# Altium PCB theremin.PcbDoc
Units mm, origin at the board's own origin, x right, y up, seen from the top; angles counter-clockwise.
Board outline 85.6 x 53.97 mm, 2 copper layers (Top Layer, Bottom Layer); 54 components, 32 nets, 165 pads, 28 vias.
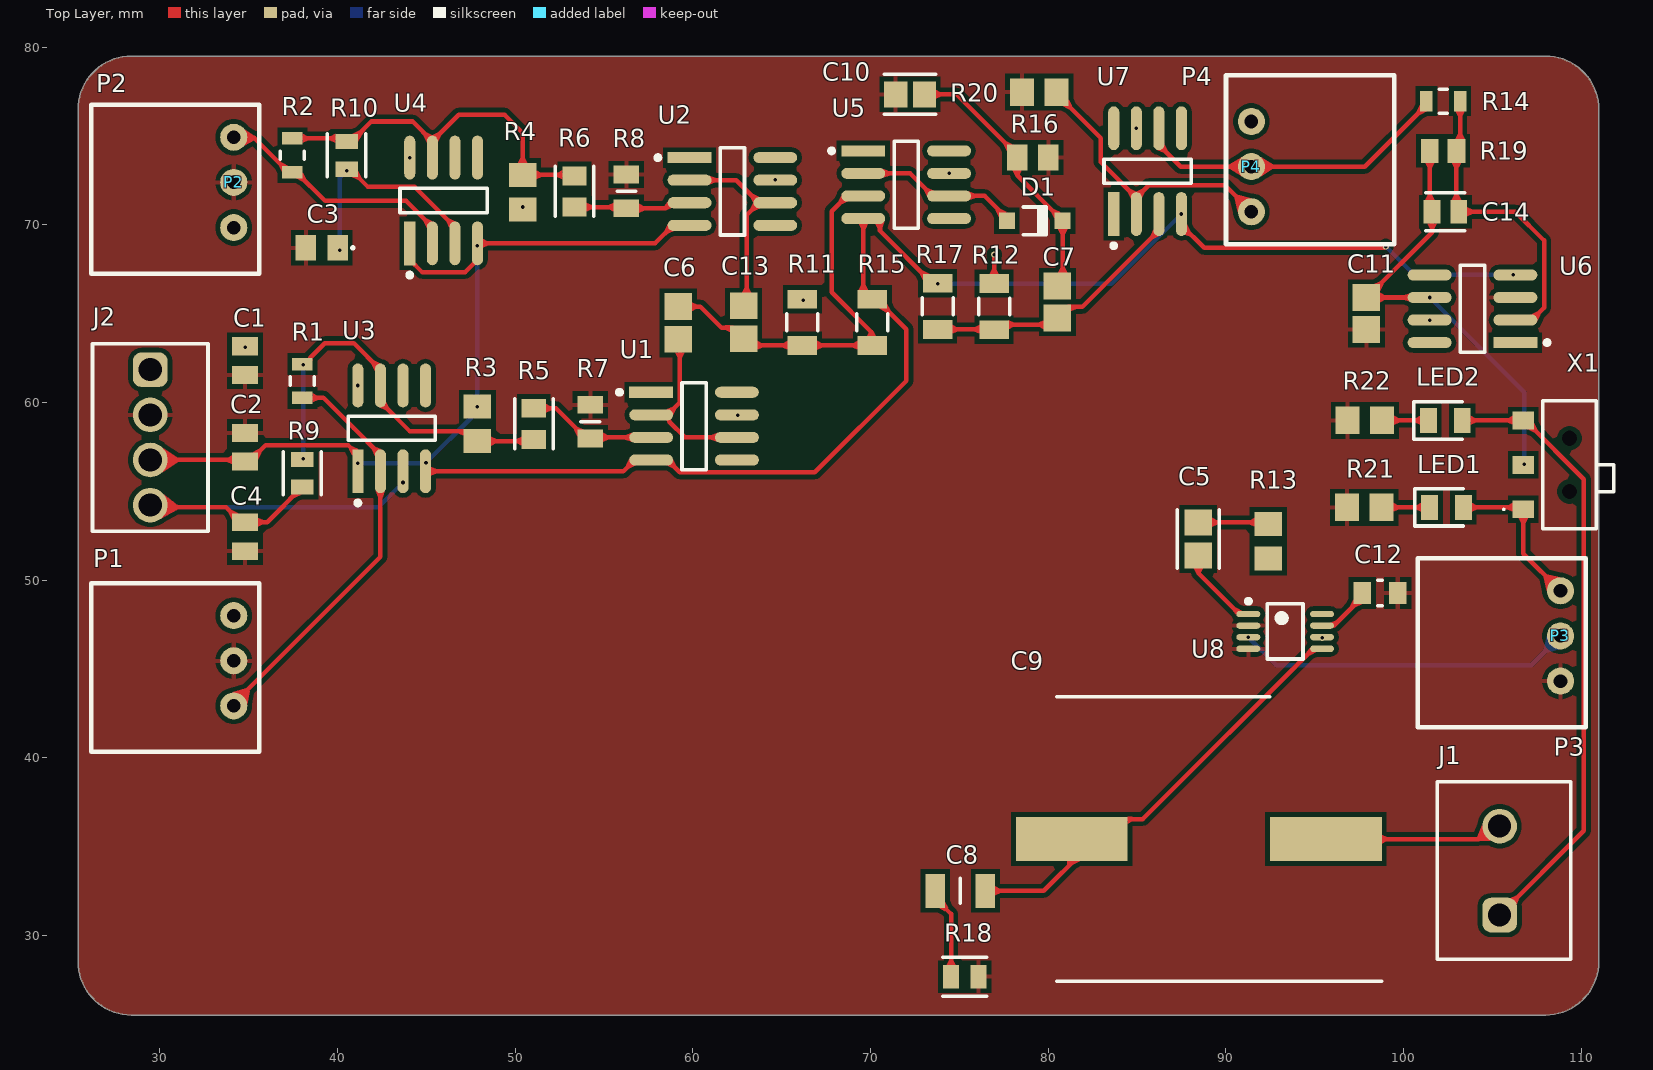
[diagram p0: Top Layer view]
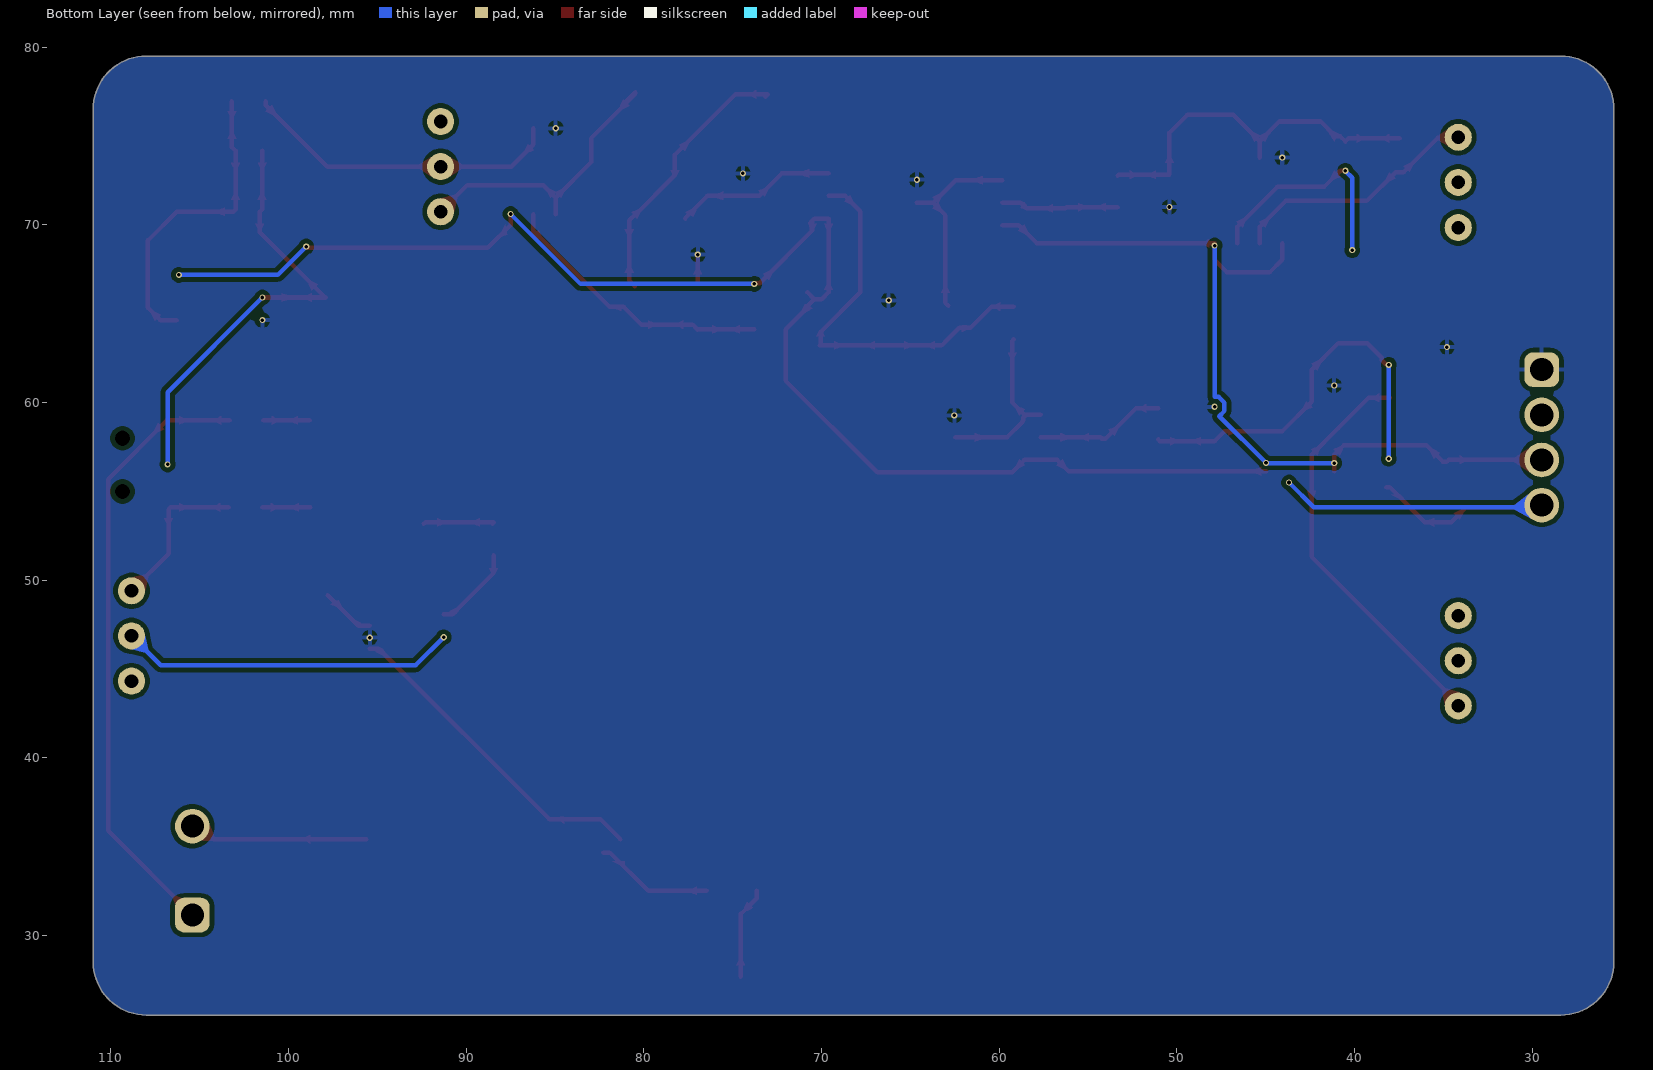
[diagram p1: Bottom Layer view, seen from below]
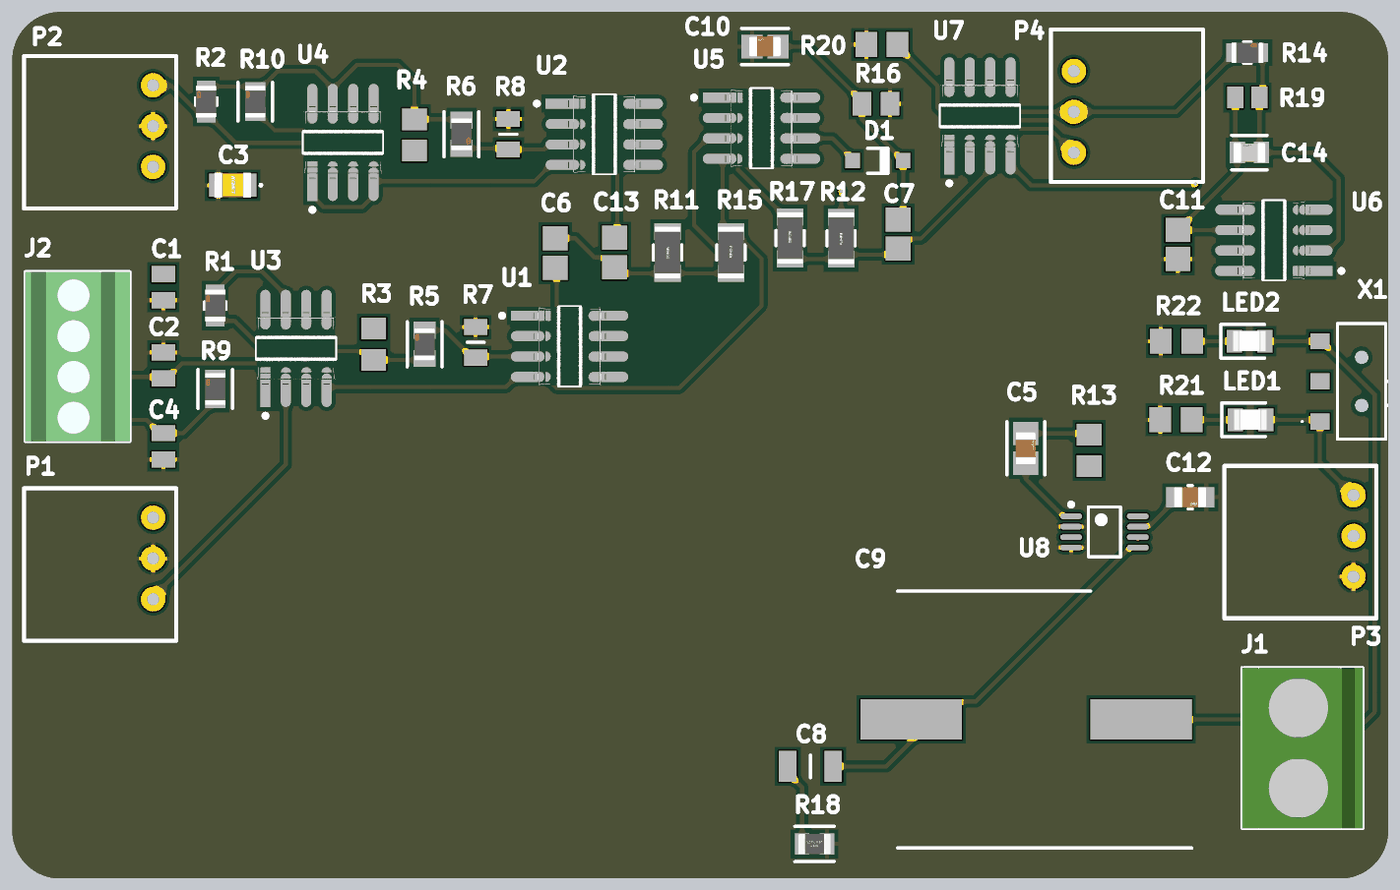
[diagram p2: 3D render of the assembled board from above, using the file's embedded part models]

## Layer stack, top to bottom
Top Solder: solder mask 0.0102, Solder Resist, Dk 3.5
Top Layer: signal copper 0.0356
Dielectric 1: dielectric 0.32, FR-4, Dk 4.8
Bottom Layer: signal copper 0.0356
Bottom Solder: solder mask 0.0102, Solder Resist, Dk 3.5

## Board outline
28.4,25.527 cw(c28.4,28.527) 25.4,28.527 25.4,76.502 cw(c28.4,76.502) 28.4,79.502 107.998,79.502 cw(c107.998,76.502) 110.998,76.502 110.998,76.454 110.998,28.527 cw(c107.998,28.527) 107.998,25.527 107.95,25.527

## Design rules (kind name [scope] priority, off if disabled: settings)
Clearance [All] p1: gap=0.254 ignorepadtopadclearanceinfootprint=FALSE
PolygonConnect [All] p1: connectstyle=Relief reliefconductorwidth=0.254 reliefentries=4 polygonreliefangle="90 Angle" airgapwidth=0.254
RoutingVias [All] p1: holewidth=0.2 width=0.35 viastyle="Through Hole" minholewidth=0.2 minwidth=0.35 maxholewidth=0.711 maxwidth=1.27
SolderMaskExpansion [All] p1: expansion=0.102 istentingtop=FALSE
SupplyNets "Schematic Supply Nets_2" [InNet('GND')] p1: voltage=0.000
SupplyNets "Schematic Supply Nets_1" [InNet('+12V')] p2: voltage=0.000
SupplyNets "Schematic Supply Nets" [InNet('-12V')] p3: voltage=0.000
Width [All] p1: maxlimit=0.254 minlimit=0.254 preferedwidth=0.254
30 further rules are at their usual default settings.

## Components (designator, comment, footprint, x,y, rotation, side; value= is the part's Value field where it differs from the comment)
C1 "KAF21KR72A105KU" CAPC2012X140N 34.798,62.357 r90 top
C2 "KAF21KR72A105KU" CAPC2012X140N 34.798,57.483 r90 top
C3 "C0805C222JCRACTU" C0805 39.116,68.707 r180 top
C4 "VJ0805A561JXAAC" CAPC2012X145N 34.798,52.451 r90 top
C5 "GRM21BR61H106ME43K" FP-GRM21B-0_2-e0_2_0_7-IPC_A 88.453,52.324 r90 top
C6 "VJ0805A220JXBMC" CAPC2013X145X48ML20T23 59.182,64.48 r270 top
C7 "08052C102K4Z2A" CAPC2013X140X50ML20T25 80.518,65.659 r270 top
C8 "12061C503JAT2A" CAPC3216X94N 75.057,32.512 r0 top
C9 "ATB477M050" CAPAE1600X1700N 88.481,35.433 r180 top
C10 "08055C472KAT2A" FP-0805-L_2_01_0_2-W_1_25-IPC_B 72.229,77.343 r180 top
C11 "08052C102K4Z2A" CAPC2013X140X50ML20T25 97.917,65.013 r90 top
C12 "08055C104J4T2A" FP-0805-L_2_01_0_2-W_1_25-MFG 98.679,49.276 r0 top
C13 "VJ0805A220JXBMC" CAPC2013X145X48ML20T23 62.865,64.516 r270 top
C14 "C0805C103J5RAC7210" FP-C0805C-DN-MFG 102.362,70.739 r0 top value="10,000 pF"
D1 "1N4148W-7-F" DIOD-SOD123-2_V 79.248,70.231 r0 top
J1 "691137710002" 691137710002 105.664,33.655 r90 top
J2 "691210910004" 691210910004 29.464,58.039 r270 top
LED1 "HSMR-C170" LEDC2012X90N 102.423,54.102 r0 top
LED2 "HSMA-C170" LEDC2012X90N 102.362,58.991 r0 top
P1 "25kOhmPotentiometer" 25kOhmPotentiometer-Footprint-1 30.861,45.085 r180 top
P2 "25kOhmPotentiometer" 25kOhmPotentiometer-Footprint-1 30.861,72.009 r180 top
P3 "25kOhmPotentiometer" 25kOhmPotentiometer-Footprint-1 105.537,46.482 r180 top
P4 "25kOhmPotentiometer" 25kOhmPotentiometer-Footprint-1 94.742,73.66 r0 top
R1 "KTR10EZPF1003" FP-KTR10-MFG 38.025,61.214 r90 top
R2 "KTR10EZPF1003" FP-KTR10-MFG 37.465,73.914 r90 top
R3 "ERJ-6ENF1001V" RESC2013X70X40ML20T20 47.879,58.801 r90 top
R4 "ERJ-6ENF1001V" RESC2013X70X40ML20T20 50.419,71.841 r270 top
R5 "KTR10EZPJ512" FP-KTR10-IPC_B 51.054,58.801 r90 top
R6 "KTR10EZPJ512" FP-KTR10-IPC_B 53.34,71.882 r270 top
R7 "4-2176238-9" RESC2012X65N 54.229,58.925 r270 top
R8 "4-2176238-9" RESC2012X65N 56.261,71.882 r270 top
R9 "KTR10EZPF2002" FP-KTR10-IPC_C 38.025,56.022 r90 top
R10 "KTR10EZPF2002" FP-KTR10-IPC_C 40.513,73.914 r90 top
R11 "KTR18EZPF1004" FP-KTR18-IPC_C 66.167,64.516 r90 top
R12 "KTR18EZPF1004" FP-KTR18-IPC_C 76.962,65.405 r90 top
R13 "ERJ-6ENF1001V" RESC2013X70X40ML20T20 92.39,52.197 r90 top
R14 "KTR10EZPJ122" FP-KTR10-MFG 102.235,76.962 r0 top
R15 "KTR18EZPF1004" FP-KTR18-IPC_C 70.104,64.516 r270 top
R16 "ERJ-6ENF4701V" RESC2013X70X40NL20T20 79.135,73.787 r180 top
R17 "KTR18EZPF1004" FP-KTR18-IPC_C 73.787,65.416 r270 top
R18 "CRGP0805F10R" FP-CRGP0805-IPC_C 75.311,27.686 r180 top value=10Ω
R19 "ERA6AEB222V" RESC2013X60X40LL20T25 102.235,74.168 r180 top
R20 "ERJ-6ENF1001V" RESC2013X70X40ML20T20 79.502,77.47 r0 top
R21 "ERJ-6ENF1001V" RESC2013X70X40ML20T20 97.79,54.102 r0 top
R22 "ERJ-6ENF1001V" RESC2013X70X40ML20T20 97.831,58.991 r180 top
U1 "LF411CDR" FP-D0008A-IPC_A 60.071,58.674 r0 top
U2 "LF411CDR" FP-D0008A-IPC_A 62.231,71.882 r0 top
U3 "LM311MX/NOPB" FP-D0008A-IPC_A 43.053,58.546 r90 top
U4 "LM311MX/NOPB" FP-D0008A-IPC_A 45.974,71.374 r90 top
U5 "LF411CDR" FP-D0008A-IPC_A 72.009,72.263 r0 top
U6 "LF411CDR" FP-D0008A-IPC_A 103.885,65.278 r180 top
U7 "LF411CDR" FP-D0008A-IPC_A 85.598,73.025 r90 top
U8 "LM386MMX-1/NOPB" TI-DGK8_L 93.345,47.117 r0 top
X1 "AYZ0102AURLC" AYZ0102AURLC 109.297,56.491 r90 top

## Footprints (in the part's own frame and the unit in brackets; to place one, negate y for a bottom-side part, rotate by r counter-clockwise, add the part's x,y. Pads: shape width x height; smd on the part's side, far side on the other; paste and mask are expansions set on the pad)
25kOhmPotentiometer-Footprint-1 [mil]
  round 60 hole 30: 1(-130,85) 2(-130,-15) 3(-130,-115)
  silkscreen extent -186,-187 186,187
691137710002 [mm] "Horizontal Cable Entry with Pressure Clamp, pitch 5mm, 02p"
  rrect50% 1.95x1.95 hole 1.3: 1(-2.5,0.25)
  round 1.95 hole 1.3: 2(2.5,0.25)
  silkscreen extent -5,-3.75 5,3.75, body extent -5,-3.75 5,3.75, height 11.6
691210910004 [mm] "2,54mm - modular - green - Horizontal wire entry - Cage clamp - 0,8mm2 wires - 04p"
  rrect50% 1.95x1.95 hole 1.3: 1(-3.81,0)
  round 1.95 hole 1.3: 2(-1.27,0) 3(1.27,0) 4(3.81,0)
  silkscreen extent -5.28,-3.25 5.28,3.25, body extent -5.28,-3.25 5.28,3.25, height 8.55
AYZ0102AURLC [mm]
  rect 1x1.2 smd: 1(-2.5,2.55) 2(0,2.55) 3(2.5,2.55)
  round 0.425 hole 0.85 unplated: MH2(-1.5,-0.05) MH3(1.5,-0.05)
  silkscreen extent -3.6,-2.55 3.6,3.7
C0805 [mm]
  rect 1.15x1.45 smd: 1(-0.9,0) 2(0.9,0)
  silkscreen extent -1.8,-0.05 -1.7,0.05, body extent -1.15,-0.78 1.15,0.77, height 0.98
CAPAE1600X1700N [mm]
  rect 6.3x2.5 smd: 1(-7.15,0) 2(7.15,0)
  silkscreen extent -10.3,-8 8,8
CAPC2012X140N [mm]
  rect 1.02x1.47 smd: 1(-0.81,0) 2(0.81,0)
CAPC2012X145N [mm]
  rect 0.99x1.47 smd: 1(-0.82,0) 2(0.82,0)
CAPC2013X140X50ML20T25 [mm] "Chip Capacitor, 2-Leads, Body 2.00x1.25mm, IPC Low Density"
  rect 1.5x1.55 smd: 1(-0.9,0) 2(0.9,0)
  body extent -1.1,-0.72 1.1,0.72, height 1.4
CAPC2013X145X48ML20T23 [mm] "Chip Capacitor, 2-Leads, Body 2.00x1.25mm, IPC Low Density"
  rect 1.5x1.55 smd: 1(-0.925,0) 2(0.925,0)
  body extent -1.1,-0.72 1.1,0.72, height 1.45
CAPC3216X94N [mm]
  rect 1.1x1.92 smd: 1(-1.41,0) 2(1.41,0)
  silkscreen extent 0,-0.7 0,0.7
DIOD-SOD123-2_V [mm] "SOD123, 2-Leads, Body 2.7x1.55mm, Height 1.45mm"
  rect 0.9x0.95 smd: 1(-1.575,0) 2(1.575,0)
  silkscreen extent -0.64,-0.82 0.64,0.77, body extent -1.35,-0.77 1.35,0.77, height 1.45
FP-0805-L_2_01_0_2-W_1_25-IPC_B [mm]
  rect 1.305x1.456 smd paste+0 mask+0: 1(-0.806,0) 2(0.806,0)
  silkscreen extent -1.46,-1.13 1.46,1.13, body extent -1.71,-0.98 1.71,0.98, height 0.25
FP-0805-L_2_01_0_2-W_1_25-MFG [mm]
  rect 1x1.25 smd paste+0 mask+0: 1(-1,0) 2(1,0)
  silkscreen extent -0.13,-0.72 0.13,0.72, body extent -1.6,-0.82 1.6,0.82, height 0.25
FP-C0805C-DN-MFG [mm]
  rect 0.95x1.35 smd paste+0 mask+0: 1(-0.75,0) 2(0.75,0)
  silkscreen extent -1.1,-1.07 1.1,1.07, body extent -1.4,-0.85 1.4,0.85, height 0.25
FP-CRGP0805-IPC_C [mm]
  rect 0.906x1.31 smd paste+0 mask+0: 1(-0.776,0) 2(0.776,0)
  silkscreen extent -1.23,-1.1 1.23,1.1, body extent -1.33,-0.8 1.33,0.8, height 0.25
FP-D0008A-IPC_A [mm]
  rect 2.469x0.622 smd paste+0 mask+0: 1(-2.414,1.905)
  rrect100% 2.469x0.622 smd paste+0 mask+0: 2(-2.414,0.635) 3(-2.414,-0.635) 4(-2.414,-1.905) 5(2.414,-1.905) 6(2.414,-0.635) 7(2.414,0.635) 8(2.414,1.905)
  silkscreen extent -4.32,-2.45 0.68,2.45, body extent -4.15,-2.95 4.15,2.95, height 0.25
FP-GRM21B-0_2-e0_2_0_7-IPC_A [mm]
  rect 1.455x1.556 smd paste+0 mask+0: 1(-0.926,0) 2(0.926,0)
  silkscreen extent -1.65,-1.18 1.65,1.18, body extent -2.15,-1.28 2.15,1.28, height 0.25
FP-KTR10-IPC_B [mm]
  rect 1.058x1.362 smd paste+0 mask+0: 1(-0.877,0) 2(0.877,0)
  silkscreen extent -1.41,-1.08 1.41,1.08, body extent -1.66,-0.93 1.66,0.93, height 0.25
FP-KTR10-IPC_C [mm]
  rect 0.858x1.262 smd paste+0 mask+0: 1(-0.777,0) 2(0.777,0)
  silkscreen extent -1.21,-1.07 1.21,1.07, body extent -1.31,-0.77 1.31,0.77, height 0.25
FP-KTR10-MFG [mm]
  rect 0.7x1.15 smd paste+0 mask+0: 1(-0.95,0) 2(0.95,0)
  silkscreen extent -0.23,-0.67 0.23,0.67, body extent -1.4,-0.77 1.4,0.77, height 0.25
FP-KTR18-IPC_C [mm]
  rect 1.056x1.658 smd paste+0 mask+0: 1(-1.301,0) 2(1.301,0)
  silkscreen extent -0.47,-0.87 0.47,0.87, body extent -1.93,-0.97 1.93,0.97, height 0.25
LEDC2012X90N [mm]
  rect 0.95x1.4 smd: 1(-0.95,0) 2(0.95,0)
  silkscreen extent -1.78,-1.05 0.95,1.05, body extent -1,-0.62 1,0.63, height 0.82
RESC2012X65N [mm]
  rect 1x1.45 smd: 1(-0.95,0) 2(0.95,0)
  silkscreen extent 0,-0.53 0,0.53
RESC2013X60X40LL20T25 [mm] "Chip Resistor, 2-Leads, Body 2.00x1.25mm, IPC High Density"
  rect 1x1.35 smd: 1(-0.75,0) 2(0.75,0)
  body extent -1.1,-0.72 1.1,0.72, height 0.6
RESC2013X70X40ML20T20 [mm] "Chip Resistor, 2-Leads, Body 2.00x1.25mm, IPC Low Density"
  rect 1.35x1.55 smd: 1(-0.975,0) 2(0.975,0)
  body extent -1.1,-0.72 1.1,0.72, height 0.7
RESC2013X70X40NL20T20 [mm] "Chip Resistor, 2-Leads, Body 2.2x1.35mm, IPC Medium Density"
  rect 1.15x1.45 smd: 1(-0.875,0) 2(0.875,0)
  body extent -1.1,-0.72 1.1,0.72, height 0.7
TI-DGK8_L [mm] "SOP, 8-Leads, Body 3.1x3.1mm, Pitch 0.65mm, IPC High Density"
  oval 1.35x0.35 smd: 1(-2.075,0.975) 2(-2.075,0.325) 3(-2.075,-0.325) 4(-2.075,-0.975) 5(2.075,-0.975) 6(2.075,-0.325) 7(2.075,0.325) 8(2.075,0.975)
  silkscreen extent -2.2,-1.55 1,1.82, body extent -1.55,-1.55 1.55,1.55, height 1.1

## Part data
C1 C2: library part CMP-042-000000-1, "Multilayer Ceramic Capacitors MLCC - SMD/SMT 100V 1uF X7R 0805 10 % AEC-Q200 FLEXITERM", Manufacturer_Name="Kyocera AVX", Mouser Part Number=581-KAF21KR72A105KU, Datasheet Link=https://spicat.kyocera-avx.com/product/KAF21KR72A105KU, Design Item ID=KAF21KR72A105KU, Geometry.Height=1.4mm, Manufacturer_Part_Number=KAF21KR72A105KU, Mouser Price/Stock=https://www.mouser.co.uk/ProductDetail/KYOCERA-AVX/KAF21KR72A105KU?qs=Jm2GQyTW%2Fbg0ToVJV7lt6A%3D%3D, Source=KAF21KR72A105KU.SchLib
C3: "Capacitor", Manufacturer_Name=KEMET, Datasheet Link=https://content.kemet.com/datasheets/KEM_C1010_X7R_HV_SMD.pdf, Height=1.1mm, Manufacturer_Part_Number=C0805C222JCRACTU
C4: library part CMP-030-000000-1, "VISHAY - VJ0805A561JXAAC - CAP, 560PF, 50V, 5%, C0G/NP0, 0805", Manufacturer_Name=Vishay, Mouser Part Number=77-VJ0805A561JXAAC, Datasheet Link=http://www.vishay.com/docs/45226/vj31xrohsautomlcc.pdf, Design Item ID=VJ0805A561JXAAC, Geometry.Height=1.45mm, Manufacturer_Part_Number=VJ0805A561JXAAC, Mouser Price/Stock=https://www.mouser.co.uk/ProductDetail/Vishay-Vitramon/VJ0805A561JXAAC?qs=ReTA%2F0kwlVYgsqJl6lJxLg%3D%3D, Source=VJ0805A561JXAAC.SchLib
C5: library part CMP-06035-037648-1, "Chip Multilayer Ceramic Capacitors for General Purpose, 0805, 10uF, X5R, 15%, 20%, 50V"
C6 C13: library part CMP-2007-01810-1, Manufacturer=Vitramon, Part Number=VJ0805A220JXBMC
C7 C11: library part CMP-2007-04594-1, Manufacturer="AVX Interconnect / Elco", Part Number=08052C102K4Z2A
C8: library part CMP-012-000000-1, "Multilayer Ceramic Capacitors MLCC - SMD/SMT 100V .05uF X7R 1206 5% Tol", Manufacturer_Name="Kyocera AVX", Mouser Part Number=581-12061C503JAT2A, Datasheet Link=http://datasheets.avx.com/X7RDielectric.pdf, Design Item ID=12061C503JAT2A, Geometry.Height=0.94mm, Manufacturer_Part_Number=12061C503JAT2A, Mouser Price/Stock=https://www.mouser.co.uk/ProductDetail/KYOCERA-AVX/12061C503JAT2A?qs=9g9l2Gjnh0tpSIGc6XCvtQ%3D%3D, Source=12061C503JAT2A.SchLib
C9: library part CMP-039-000000-1, "Aluminum Electrolytic Capacitors - SMD 470uF, 50V, 20%, 16x16.5mm SMD", Manufacturer_Name="Cornell Dubilier", Mouser Part Number=598-ATB477M050, Datasheet Link=https://www.digikey.com/en/products/detail/cornell-dubilier-knowles/ATB477M050/24616741?msockid=3e3afa68a50969ca3057ef1ca4c9684b, Design Item ID=ATB477M050, Geometry.Height=17mm, Manufacturer_Part_Number=ATB477M050, Mouser Price/Stock=https://www.mouser.co.uk/ProductDetail/Cornell-Dubilier-CDE/ATB477M050?qs=IKkN%2F947nfC8QcoyhYiJ5w%3D%3D, Source=ATB477M050.SchLib
C10: library part CMP-1036-03594-3, "General Purpose Ceramic Capacitor, 0805, 4.7nF, 10%, X7R, 0.15, 50V", Capacitance=4.7nF, Case Code (Imperial)=0805, Case Code (Metric)=2012, Dielectric=X7R, Dielectric Material=Ceramic, Insulation Resistance=100GR, Max Operating Temperature=125°C, Min Operating Temperature=-55°C, Package Quantity=1, Tolerance=10%, Voltage=50V, Case/Package=0805, Construction=Flat, Contact Plating=Tin, Depth=1.25mm, Dissipation Factor=2.5%, Height=0.94mm, Lead Free="Lead Free", Length=2.01mm, Mount="Surface Mount", Number of Pins=2, Packaging="Tape and Reel", Radiation Hardening=No, REACH SVHC="No SVHC", RoHS Compliant=Yes, Series=-, Size=0.94mm, Termination=SMD/SMT, Thickness=0.037inch, Voltage Rating=50V, Voltage Rating (DC)=50V, Width=1.25mm
C12: library part CMP-2007-04725-2, "Automotive Ceramic Capacitor, 0805, 100nF, 5%, X7R, 15%, 50V", Capacitance=100nF, Case Code (Imperial)=0805, Case Code (Metric)=2012, Dielectric=X7R, Max Operating Temperature=125°C, Min Operating Temperature=-55°C, Package Quantity=4000, Ratings=AEC-Q200, Tolerance=5%, Voltage Rating=50V, Case/Package=0805, Construction=Flat, Contact Plating=Tin, Depth=1.25mm, Dissipation Factor=2.5%, Height=0.94mm, Lead Free="Lead Free", Length=2.01mm, Mount="Surface Mount", Number of Pins=2, Packaging="Tape and Reel", Radiation Hardening=No, RoHS Compliant=Yes, Series=-, Termination=SMD/SMT, Thickness=0.037inch, Voltage Rating (DC)=50V, Width=0.049inch
C14: library part CMP-2007-01173-3, "CAP CER SMD 0805 .01UF X7R 5% 50", Capacitance="10,000 pF", Manufacturer=KEMET, Package=C0805C-DN, Temperature="-55°C to +125°C", Temperature Characteristic=X7R, Temperature Coefficient=30ppm/°C, Temperature Range High=+125°C, Temperature Range Low=-55°C, Tolerance=0.05, Voltage Rating="50 V", Automotive=No, Category=Cap, ComponentLink2Description=Datasheet, ComponentLink2URL=https://content.kemet.com/datasheets/KEM_C1003_C0G_SMD.pdf, Device Class L1="Passive Components", Device Class L2=Capacitors, Device Class L3="Ceramic Capacitors", Digikey Description="CAP CER SMD 0805 .01UF X7R 5% 50", Height=0.88mm, Ipc Land Pattern Name=CAPC200125X78, Lead Free=Yes, Manufacturer Part Number=C0805C103J5RAC7210, Material=Ceramic, Mouser Description="Cap Ceramic 0.01uF 50V X7R 5% Pad SMD 0805 125C T/R", Octopart=https://octopart.com/c0805c103j5rac7210-kemet-3921106, RoHS=TRUE
D1: library part CMP-2000-04932-2, "Fast Switching Diode, 100 V, 0.15 A, -65 to 150 degC, 2-Pin?SOD123, RoHS, Tape and Reel", If - Forward Current=0.15A, Ir - Reverse Current=1uA, Manufacturer=DiodesIncorporated, Max Surge Current=2A, Maximum Operating Temperature=+150C, Minimum Operating Temperature=-65C, Operating Temperature Range=-65Cto+150C, Package / Case=SOD-123, Package Reference=SOD123-2, Peak Reverse Voltage=100V, Vf - Forward Voltage=1.25V, Brand=DiodesIncorporated, Configuration=Single, Datasheet URL=http://www.farnell.com/datasheets/1915529.pdf, Datasheet Version="Rev. 24-2, 10/2013", Factory Pack Quantity=3000, Height=1.25mm, Length=2.85mm, Manufacturer URL=http://www.diodes.com/, Mounting Style=SMD/SMT, Package URL=http://www.diodes.com/datasheets/ds18004.pdf, Packaging=Reel, Product=SwitchingDiodes, Product Category=Diodes-GeneralPurpose,Power,Switching, Recovery Time=4ns, RoHS=True, Series=1N4148, Type=SwitchingDiode, Unit Weight=0.000353oz, Width=1.7mm
J1: library part CMP-1502-03324-2, Current Rating=16A, Max Operating Temperature=120°C, Min Operating Temperature=-30°C, Voltage Rating=300V, Contact Material="Nickel, Tin", Height=11.6mm, Lead Pitch=5mm, NexarPartId=78871135, Number of Contacts=2, Number of Pins=2, Number of Rows=1, Packaging=Box, RoHS=Non-Compliant
J2: library part CMP-1502-02458-2, NexarPartId=105950651
LED1: "LED", Manufacturer_Name="Avago Technologies", Mouser Part Number=630-HSMR-C170, Datasheet Link=https://datasheet.datasheetarchive.com/originals/dk/DKDS-25/484042.pdf, Height=0.9mm, Manufacturer_Part_Number=HSMR-C170, Mouser Price/Stock=https://www.mouser.co.uk/ProductDetail/Broadcom-Avago/HSMR-C170?qs=YDL0qNrpDT75U8LW5zK4Qg%3D%3D
LED2: "LED", Manufacturer_Name="Avago Technologies", Mouser Part Number=630-HSMA-C170, Datasheet Link=https://docs.broadcom.com/docs/AV02-0112EN, Height=0.9mm, Manufacturer_Part_Number=HSMA-C170, Mouser Price/Stock=https://www.mouser.co.uk/ProductDetail/Broadcom-Avago/HSMA-C170?qs=YDL0qNrpDT47TEfDRX4SKQ%3D%3D
P1: library part CMP-009-00188-4, "25k Ohm Potentiometer"
P2 P3 P4: library part CMP-009-00188-3, "25k Ohm Potentiometer"
R1 R2: library part CMP-08839-031120-1, "Res Thick Film 0805 100kΩ 1% 0.125W ±100ppm/°C Automotive Paper T/R", Case Code (Imperial)=0805, Case Code (Metric)=2012, Max Operating Temperature=155°C, Max Power Dissipation=125mW, Min Operating Temperature=-55°C, Resistance=100kR, Resistor Type="Thick Film", Temperature Coefficient=100ppm/°C, Tolerance=1%, Case/Package=0805, Contact Plating=Tin, Features="Automotive AEC-Q200", Number of Terminations=2, Packaging="Tape and Reel", RoHS Compliant=Yes, Series=KTR
R3 R4 R13 R20 R21 R22: library part CMP-2001-04375-5, "Chip Resistor, 1 KOhm, +/- 1%, 0.125 W, -55 to 155 degC, 0805 (2012 Metric), RoHS, Tape and Reel", Manufacturer=Panasonic, Max Operating Temperature="155 degC", Min Operating Temperature="-55 degC", Package Quantity=1, Voltage Rating="150 V", ComponentLink1Description="Manufacturer URL", ComponentLink1URL=http://www.panasonic.com/, ComponentLink2Description=Datasheet, ComponentLink2URL=http://industrial.panasonic.com/cdbs/www-data/pdf/RDA0000/AOA0000C86.pdf, DatasheetVersion=04/2015, Height="0.6 mm", Length="2 mm", Mount="Surface Mount", Mounting Technology="Surface Mount", PackageDescription="2-Pin Surface Mount Device, Body 2 x 1.25 mm", PackageReference=0805, Packaging="Cut Tape", REACH SVHC=Yes, RoHSCompliant=true
R5 R6: library part CMP-08839-030996-1, "Res Thick Film 0805 5.1kΩ 5% 0.125W ±200ppm/°C Automotive Paper T/R", Case/Package=0805, Max Operating Temperature=155°C, Max Power Dissipation=125mW, Min Operating Temperature=-55°C, Package Quantity=5000, Resistance=5.1kR, Resistor Type="Thick Film", Temperature Coefficient=200ppm/°C, Tolerance=5%, Height=0.026inch, Length=0.079inch, Number of Terminations=2, Packaging="Tape and Reel", RoHS Compliant=Yes, Series=KTR10, Width=0.049inch
R7 R8: library part CMP-045-000000-3, "Thin Film Resistors - SMD CPF A 0805 10K 0.1% 25PPM 5K RL", Manufacturer_Name="TE Connectivity", Datasheet Link=https://www.te.com/commerce/DocumentDelivery/DDEController?Action=srchrtrv&DocNm=1773200-1&DocType=Data%20Sheet&DocLang=English&DocFormat=pdf&PartCntxt=4-2176238-9, Design Item ID=4-2176238-9, Geometry.Height=0.65mm, Manufacturer_Part_Number=4-2176238-9, Source=4-2176238-9.SchLib
R9 R10: library part CMP-08839-031312-1, "Res Thick Film 0805 20kΩ 1% 0.125W ±100ppm/°C Automotive Paper T/R", Case Code (Imperial)=0805, Case Code (Metric)=2012, Max Operating Temperature=155°C, Max Power Dissipation=125mW, Min Operating Temperature=-55°C, Resistance=20kR, Resistor Type="Thick Film", Temperature Coefficient=100ppm/°C, Tolerance=1%, Case/Package=0805, Features="Automotive AEC-Q200", Number of Terminations=2, Packaging="Tape and Reel", RoHS Compliant=Yes, Series=KTR
R11 R12 R15 R17: library part CMP-08839-030004-1, "Res Thick Film 1206 1MΩ 1% 0.1W ±100ppm/°C Automotive Paper T/R", Case Code (Imperial)=1206, Case Code (Metric)=3216, Max Operating Temperature=155°C, Max Power Dissipation=250mW, Min Operating Temperature=-55°C, Package Quantity=1, Resistance=1MR, Resistor Type="Thick Film", Temperature Coefficient=100ppm/°C, Tolerance=1%, Case/Package=1206, Features="Automotive AEC-Q200", Height=0.026inch, Lead Free="Lead Free", Length=0.126inch, Mount="Surface Mount", Number of Terminations=2, Packaging="Tape and Reel", Power Rating=250mW, RoHS Compliant=Yes, Series=KTR18, Width=0.063inch
R14: library part CMP-08839-029999-1, "Res Thick Film 0805 1.2kΩ 5% 0.125W ±200ppm/°C Automotive Paper T/R", Case/Package=0805, Max Operating Temperature=155°C, Max Power Dissipation=125mW, Min Operating Temperature=-55°C, Package Quantity=5000, Resistance=1.2kR, Resistor Type="Thick Film", Temperature Coefficient=200ppm/°C, Tolerance=5%, Height=0.026inch, Length=0.079inch, Number of Terminations=2, Packaging="Tape and Reel", RoHS Compliant=Yes, Series=KTR10, Width=0.049inch
R16: library part CMP-2001-00550-5, "Chip Resistor, 4.7 KOhm, +/- 1%, 0.125 W, -55 to 155 degC, 0805 (2012 Metric), RoHS, Tape and Reel", Manufacturer=Panasonic, Max Operating Temperature="155 degC", Min Operating Temperature="-55 degC", Package Quantity=5000, Voltage Rating="150 V", ComponentLink1Description="Manufacturer URL", ComponentLink1URL=http://www.panasonic.com/, ComponentLink2Description=Datasheet, ComponentLink2URL=http://industrial.panasonic.com/cdbs/www-data/pdf/RDA0000/AOA0000C86.pdf, DatasheetVersion=04/2015, Height="0.6 mm", Length="2 mm", Mount="Surface Mount", Mounting Technology="Surface Mount", PackageDescription="2-Pin Surface Mount Device, Body 2 x 1.25 mm", PackageReference=0805, Packaging="Tape and Reel", Pins=2, REACH SVHC=Yes, RoHSCompliant=true
R18: library part CMP-03211-010199-1, "CRGP 0805 10R 1%", Ambient Temperature Range High=+70°C, Manufacturer=TE, Package=CRGP0805, Power Rating=0.33W, Resistance=10Ω, Temperature="-55°C to +155°C", Temperature Coefficient=±100ppm/°C, Temperature Range High=+155°C, Temperature Range Low=-55°C, Tolerance=0.01, Voltage Rating=150V, Automotive=No, Category=Res, ComponentLink2Description=Datasheet, ComponentLink2URL=https://www.mouser.com/datasheet/2/418/NG_DS_9-1773463-9_A-1358566.pdf, Composition="Thick Film", Device Class L1="Passive Components", Device Class L2=Resistors, Device Class L3="Chip SMD Resistors", Digikey Description="CRGP 0805 10R 1%", Height=0.65mm, Ipc Land Pattern Name=RESC200125X55, Lead Free=Yes, Manufacturer Part Number=CRGP0805F10R, Octopart=https://octopart.com/crgp0805f10r-te+connectivity-91018783, RoHS=TRUE, Series=CRGP
R19: library part CMP-2001-00613-1, Manufacturer=Panasonic, Part Number=ERA6AEB222V
U1 U2 U5 U6 U7: library part CMP-04895-000362-1, "IC OPAMP JFET 1 CIRCUIT 8SOIC", Case/Package=SOIC, Dual Supply Voltage=15V, Input Bias Current=200pA, Input Noise Current Density="0.01pA/sqrt Hz", Input Offset Voltage (Vos)=2mV, Input Voltage Noise Density="18nV/sqrt Hz", Max Dual Supply Voltage=18V, Max Operating Temperature=70°C, Max Power Dissipation=500mW, Max Supply Voltage=36V, Min Dual Supply Voltage=3.5V, Min Operating Temperature=0°C, Min Supply Voltage=7V, Nominal Supply Current=3.4mA, Operating Supply Current=2mA, Package Quantity=2500, Voltage Gain=106.02dB, Bandwidth=3MHz, Common Mode Rejection Ratio=100dB, Contact Plating=Gold, Gain Bandwidth Product=3MHz, Height=1.58mm, Lead Free="Lead Free", Length=4.9mm, Mount="Surface Mount", Number of Channels=1, Number of Circuits=1, Number of Elements=1, Number of Pins=8, Operating Supply Voltage=18V, Packaging="Cut Tape", Radiation Hardening=No, RoHS Compliant=Yes, Series=LF411, Slew Rate=15V/µs, Supply Type=Dual, Technology=BIFET, Unity Gain Bandwidth Product=3MHz, Weight=0.002561oz, Width=3.91mm
U3 U4: library part CMP-04896-000087-1, "IC VOLTAGE COMPARATOR 8-SOIC", Case/Package=SOIC, Input Bias Current=250nA, Input Offset Voltage (Vos)=7.5mV, Max Dual Supply Voltage=18V, Max Operating Temperature=70°C, Max Power Dissipation=500mW, Max Supply Current=7.5mA, Max Supply Voltage=36V, Min Dual Supply Voltage=2.5V, Min Operating Temperature=0°C, Min Supply Voltage=5V, Output Current=50mA, Package Quantity=1, Voltage Gain=106.02dB, Lead Free="Lead Free", Max Input Current=250nA, Mount="Surface Mount", Nominal Supply Current=7.5mA, Number of Channels=1, Number of Elements=1, Number of Pins=8, Output Compatibility=TTL, Output Type=TTL, Packaging="Tape and Reel", Power Dissipation=500mW, Quiescent Current=7.5mA, Radiation Hardening=No, REACH SVHC="No SVHC", Response Time=200ns, Series=-, Supply Current=7.5mA, Technology=BIPOLAR, Type="General Purpose"
U8: library part CMP-0994-00049-1, "Low Voltage Audio Power Amplifier, 0 to 70 degC, 8-pin SOP (DGK8), Green (RoHS & no Sb/Br)", Manufacturer="Texas Instruments", Code_JEDEC=MO-187, ComponentLink1Description="Manufacturer URL", ComponentLink1URL=http://www.ti.com/, ComponentLink2Description=Datasheet, ComponentLink2URL=http://www.ti.com/general/docs/lit/getliterature.tsp?genericPartNumber=LM386&fileType=pdf, ComponentLink3Description="Package Specification", ComponentLink3URL=http://www.ti.com/litv/pdf/mpds028d, DatasheetVersion=SNAS545A, Eco-Plan="Green (RoHS & no Sb/Br)", Input Type=Analog, Max. Number of Speaker Outputs=1, Mounting Technology="Surface Mount", PackageDescription="8-Pin Thin Small Outline, Body 3 x 3 mm, Pitch 0.65 mm", PackageReference=DGK8, PackageVersion="4073329/E, 05/2006", PartNumber=LM386MMX-1/NOPB, SubFamily="Mid/High-Power Amplifier"
X1: library part CMP-027-000000-1, "Slide Switch SPDT Surface Mount, Right Angle", Manufacturer_Name="C & K COMPONENTS", Mouser Part Number=611-AYZ0102AURLC, Datasheet Link=https://www.ckswitches.com/media/1431/ayz.pdf, Design Item ID=AYZ0102AURLC, Geometry.Height=1.5mm, Manufacturer_Part_Number=AYZ0102AURLC, Mouser Price/Stock=https://www.mouser.co.uk/ProductDetail/CK/AYZ0102AURLC?qs=By6Nw2ByBD1%2Fz8mFHu%2F4MQ%3D%3D, Source=AYZ0102AURLC.SchLib

## Via types
v1: diameter 0.35, hole 0.2, Top Layer to Bottom Layer, 28 vias

## Nets (pads, with @x,y where several pads share a name; then routed paths per layer and width w, separated by ;. In a path a pad name is that pad's centre, name@x,y a point inside that pad or via, vN(x,y) a via of type N, cw(c..) or ccw(c..) an arc to the next point about the centre after c; other vN are vias at no path point)
+12V: C1.2 J2.1 R3.2 R4.2 R11.2 R12.2 U1.7 U2.7 U3.8 U4.8 U5.7 U6.7 U7.7 U8.6 | length 2
  Top Layer w0.254: v1(34.798,63.119) C1.2 ; v1(47.879,59.759) R3.2 ; R4.2 v1(50.419,71.005) ; U1.7 62.519,59.274 v1(62.529,59.274) ; v1(64.632,72.542) 64.632,72.53 U2.7 ; R11.2 66.167,65.8 v1(66.219,65.748) ; R12.2 v1(76.962,68.326) ; U8.6 95.42,46.774 v1(95.428,46.766)
  other v1: 41.148,60.96 101.472,64.643 74.423,72.898 44.069,73.788 84.963,75.439
-12V: C2.1 J2.3 R15.1 R17.1 U1.4 U2.4 U3.1 U3.4 U4.1 U4.4 U5.4 U6.4 U7.4 | length 132.3
  Top Layer w0.254: J2.3 34.702,56.769 C2.1 35.023,56.673 35.959,57.609 40.595,57.609 41.148,57.056 v1(41.148,56.595) U3.1 ; U4.1 44.069,68.037 44.761,67.345 47.187,67.345 47.879,68.037 U4.4 57.877,68.96 58.893,69.977 U2.4 ; U3.4 56.098,56.133 56.734,56.769 U1.4 58.581,56.769 59.273,56.077 66.872,56.077 72.009,61.214 72.009,64.135 70.806,65.338 70.806,65.416 R15.1@70.405,65.817 ; U5.4@70.419,70.358 U5.4@70.589,70.188 ; R15.1@70.806,66.218 R15.1@70.405,65.817 ; R17.1 73.486,66.718 70.537,69.666 70.537,70.188 70.367,70.358 U5.4 69.595,66.218 69.996,65.817 R15.1 R15.1@70.405,65.817 ; v1(87.503,70.612) 87.503,69.985 88.781,68.707 98.934,68.707 v1(99.006,68.779)
  Bottom Layer w0.254: v1(41.148,56.595) 44.911,56.595 44.958,56.642 44.958,56.63 v1(44.984,56.604) 47.615,59.236 47.323,59.528 47.323,59.989 47.649,60.315 47.879,60.315 v1(47.879,68.834) ; v1(73.787,66.675) 83.566,66.675 v1(87.503,70.612) ; v1(99.006,68.779) 100.602,67.183 v1(106.172,67.183)
AmpOut: C11.2 C14.1 R19.2 U6.6 X1.2 | length 25
  Top Layer w0.254: v1(101.472,65.913) C11.2 97.942,65.913 101.612,69.583 C14.1 101.485,70.866 R19.2
  Bottom Layer w0.254: v1(101.472,65.913) 106.807,60.578 v1(106.807,56.515)
FixOscOut: C13.1 U2.2 U2.6 | length 11.5
  Top Layer w0.254: U2.2 62.451,72.517 U2.6@63.721,71.247 ; C13.1 63.029,65.605 63.029,70.555 U2.6@63.721,71.247 ; U2.6 U2.6@63.721,71.247
GND: C1.1 C2.2 C3.2 C4.1 C10.2 C11.1 C12.2 J2.2 P1.2 P2.2 P3.1 R7.1 R8.1 R16.1 R18.1 R20.1 R21.1 R22.2 U6.3 U8.2 U8.4
NetC3_1: C3.1 R10.1 U4.3 | length 13
  Top Layer w0.254: v1(40.513,73.051) 40.801,73.051 41.716,72.136 44.357,72.136 46.609,69.884 U4.3
  Bottom Layer w0.254: v1(40.132,68.58) 40.132,72.645 40.513,73.026 v1(40.513,73.051)
NetC5_1: C5.1 U8.1 | length 4.8
  Top Layer w0.254: C5.1 88.453,50.409 90.77,48.092 U8.1
NetC5_2: C5.2 R13.2 | length 4.1
  Top Layer w0.254: C5.2@88.531,53.172 C5.2 92.312,53.25 R13.2
NetC6_1: C6.1 C13.2 R11.1 R15.2 U5.3 | length 22.5
  Top Layer w0.254: C6.1 60.428,65.405 61.619,64.214 62.242,64.214 C13.2 63.241,63.215 R11.1 R15.2 70.051,63.268 70.051,63.975 67.818,66.207 67.818,70.774 68.672,71.628 U5.3
NetC7_1: C7.1 C10.1 D1.2 R16.2 | length 15.4
  Top Layer w0.254: C10.1@73.157,77.22 C10.1 74.854,77.343 78.26,73.937 R16.2 78.26,72.794 80.475,70.579 80.5,70.579 80.823,70.256 D1.2 80.823,66.864 C7.1
NetC7_2: C7.2 R12.1 R17.2 U7.3 | length 16.7
  Top Layer w0.254: R17.2 76.951,64.115 R12.1 77.247,64.389 80.148,64.389 C7.2 81.141,65.382 81.927,65.382 86.233,69.688 U7.3 U7.3@86.233,69.588
NetC8_1: C8.1 R18.2 | length 5.2
  Top Layer w0.254: C8.1 73.647,32.102 74.535,31.214 R18.2
NetC8_2: C8.2 C9.2 U8.5 | length 25.2
  Top Layer w0.254: C8.2 79.756,32.512 81.915,34.671 C9.2@82.296,34.671 ; C9.2 82.454,36.556 85.334,36.556 94.92,46.142 U8.5
NetC12_1: C12.1 U8.7 | length 3.1
  Top Layer w0.254: U8.7 96.083,47.442 C12.1@97.79,49.149
NetC14_2: C14.2 R14.2 R19.1 U6.2 | length 17.5
  Top Layer w0.254: R14.2 103.185,74.368 R19.1 102.985,70.866 C14.2 106.299,70.739 107.915,69.123 107.915,65.335 107.223,64.643 U6.2
NetD1_1: D1.1 U5.2 U5.6 | length 9.1
  Top Layer w0.254: U5.2 72.229,72.898 73.499,71.628 U5.6 76.428,71.628 77.673,70.383 D1.1@77.673,70.358
NetLED1_1: LED1.1 R21.2 | length 2.7
  Top Layer w0.254: R21.2 LED1.1
NetLED2_1: LED2.1 R22.1 | length 2.6
  Top Layer w0.254: R22.1 LED2.1
NetP1_1: P1.1 R1.1 U3.2 | length 23.3
  Top Layer w0.254: P1.1@34.036,42.926 42.418,51.308 U3.2 42.418,57.056 40.927,58.547 39.21,60.264 R1.1
NetP2_3: P2.3 R2.1 U4.2 | length 14.2
  Top Layer w0.254: P2.3 34.195,74.898 35.306,74.898 37.24,72.964 R2.1 37.69,72.964 39.306,71.348 43.875,71.348 45.339,69.884 U4.2
NetP3_2: P3.2 U8.3 | length 18.9
  Bottom Layer w0.254: v1(91.27,46.792) 92.85,45.212 107.188,45.212 P3.2
NetP4_2: P4.2 R14.1 U7.6 | length 18.1
  Top Layer w0.254: U7.6 86.233,74.515 87.469,73.279 P4.2 97.827,73.279 101.285,76.737 R14.1
NetP4_3: P4.3 R20.2 U7.2 | length 16.8
  Top Layer w0.254: R20.2 80.477,77.37 82.959,74.888 82.959,73.539 U7.2@84.963,71.535 ; R20.2@80.518,77.429 R20.2@80.985,76.962 ; U7.2 U7.2@84.963,71.535 ; P4.3 89.952,72.227 85.655,72.227 U7.2@84.963,71.535
NetR1_2: R1.2 R3.1 R5.1 R9.2 U3.7 | length 22.3
  Top Layer w0.254: v1(38.071,62.121) 38.114,62.164 38.25,62.164 38.473,62.387 38.473,62.523 39.29,63.34 40.927,63.34 42.418,61.849 42.418,60.036 44.08,58.374 47.331,58.374 R3.1 50.956,57.826 R5.1
  Bottom Layer w0.254: v1(38.071,62.121) 38.071,56.925 38.1,56.896 38.1,56.853 v1(38.081,56.833)
NetR2_2: R2.2 R4.1 R6.1 R10.2 U4.7 | length 21.2
  Top Layer w0.254: R2.2 40.34,74.864 R10.2 40.815,74.993 41.084,74.993 41.91,75.819 44.231,75.819 U4.7@45.339,74.711 ; U4.7 U4.7@45.339,74.711 ; R6.1 53.283,72.816 R4.1 50.419,75.184 49.403,76.2 46.828,76.2 U4.7@45.339,74.711
NetR5_2: R5.2 R7.2 U1.3 | length 8.2
  Top Layer w0.254: R5.2 52.301,59.678 54.004,57.975 R7.2 54.293,58.039 U1.3 U1.3@56.834,58.039
NetR6_2: R6.2 R8.2 U2.3 | length 6.6
  Top Layer w0.254: R6.2 56.188,71.005 R8.2 58.479,70.932 58.794,71.247 U2.3
PitchOut: J1.1 LED2.2 X1.3 | length 34.7
  Top Layer w0.254: LED2.2 X1.3 ; J1.1 110.153,35.894 110.153,55.685 X1.3@106.847,58.991 ; X1.3@107.22,58.518 X1.3@107.22,58.618
SpkrIn: LED1.2 P3.3 X1.1 | length 8.9
  Top Layer w0.254: LED1.2 106.636,54.102 X1.1 106.747,51.495 P3.3
SpkrOut: C9.1 J1.2 | length 10.1
  Top Layer w0.254: C9.1 104.233,35.433 104.955,36.155 J1.2
TxIn: C4.2 J2.4 R9.1 U3.3 | length 23.7
  Top Layer w0.254: J2.4@29.972,54.102 33.727,54.102 34.558,53.271 C4.2 36.051,53.271 R9.1 R9.1@38.227,55.245
  Bottom Layer w0.254: J2.4@29.972,54.102 42.291,54.102 v1(43.688,55.499)
VarOscOut: C6.2 U1.2 U1.6 | length 10.2
  Top Layer w0.254: U1.2 U1.2@58.452,59.309 ; C6.2 59.273,63.464 59.273,60.001 58.581,59.309 U1.2@58.452,59.309 ; U1.6 59.56,58.039 58.674,58.925 58.674,58.976 58.651,58.999 58.651,59.139 58.546,59.245 58.517,59.245 U1.2@58.452,59.309
pads on no net: P1.3 P2.1 P4.1 R13.1 U1.1 U1.5 U1.8 U2.1 U2.5 U2.8 U3.5 U3.6 U4.5 U4.6 U5.1 U5.5 U5.8 U6.1 U6.5 U6.8 U7.1 U7.5 U7.8 U8.8 X1.MH2 X1.MH3

## Polygon pours and split planes (outlines as drawn)
+12V on Bottom Layer "+12V_L02_P001" (solid, remove dead copper, pour order 1): 28.4,25.527 cw(c28.4,28.527) 25.4,28.527 25.4,76.502 cw(c28.4,76.502) 28.4,79.502 107.998,79.502 cw(c107.998,76.502) 110.998,76.502 110.998,76.454 110.998,28.527 cw(c107.998,28.527) 107.998,25.527 107.95,25.527
GND on Top Layer "GND_L01_P000" (solid, remove dead copper, pour order 0): 28.4,25.527 cw(c28.4,28.527) 25.4,28.527 25.4,76.502 cw(c28.4,76.502) 28.4,79.502 107.998,79.502 cw(c107.998,76.502) 110.998,76.502 110.998,76.454 110.998,28.527 cw(c107.998,28.527) 107.998,25.527 107.95,25.527

## Silkscreen, mask and mechanical layers (free items; w line width, h text height)
Mechanical 1:
  lines w0.254: 107.95,25.527 28.184,25.527 cw(c28.184,28.263) 25.447,28.263 25.4,76.502 cw(c28.4,76.502) 28.4,79.502 107.95,79.502 ; 107.998,25.527 ccw(c107.998,28.527) 110.998,28.527 110.998,76.454 ; 107.998,79.502 cw(c107.998,76.502) 110.998,76.502